# Altium PCB Rev4_FE_Test.PCBDOC (part 2 of 2)
Units mm, origin at the board's own origin, x right, y up, seen from the top; angles counter-clockwise.
Board outline 99.7 x 23.5 mm, 6 copper layers (Top Layer, Int1 (GND), Int2 (Sign), Int3 (Sign), Int4 (GND), Bottom Layer), stack 1.49 mm thick; 159 components, 78 nets, 449 pads, 301 vias.
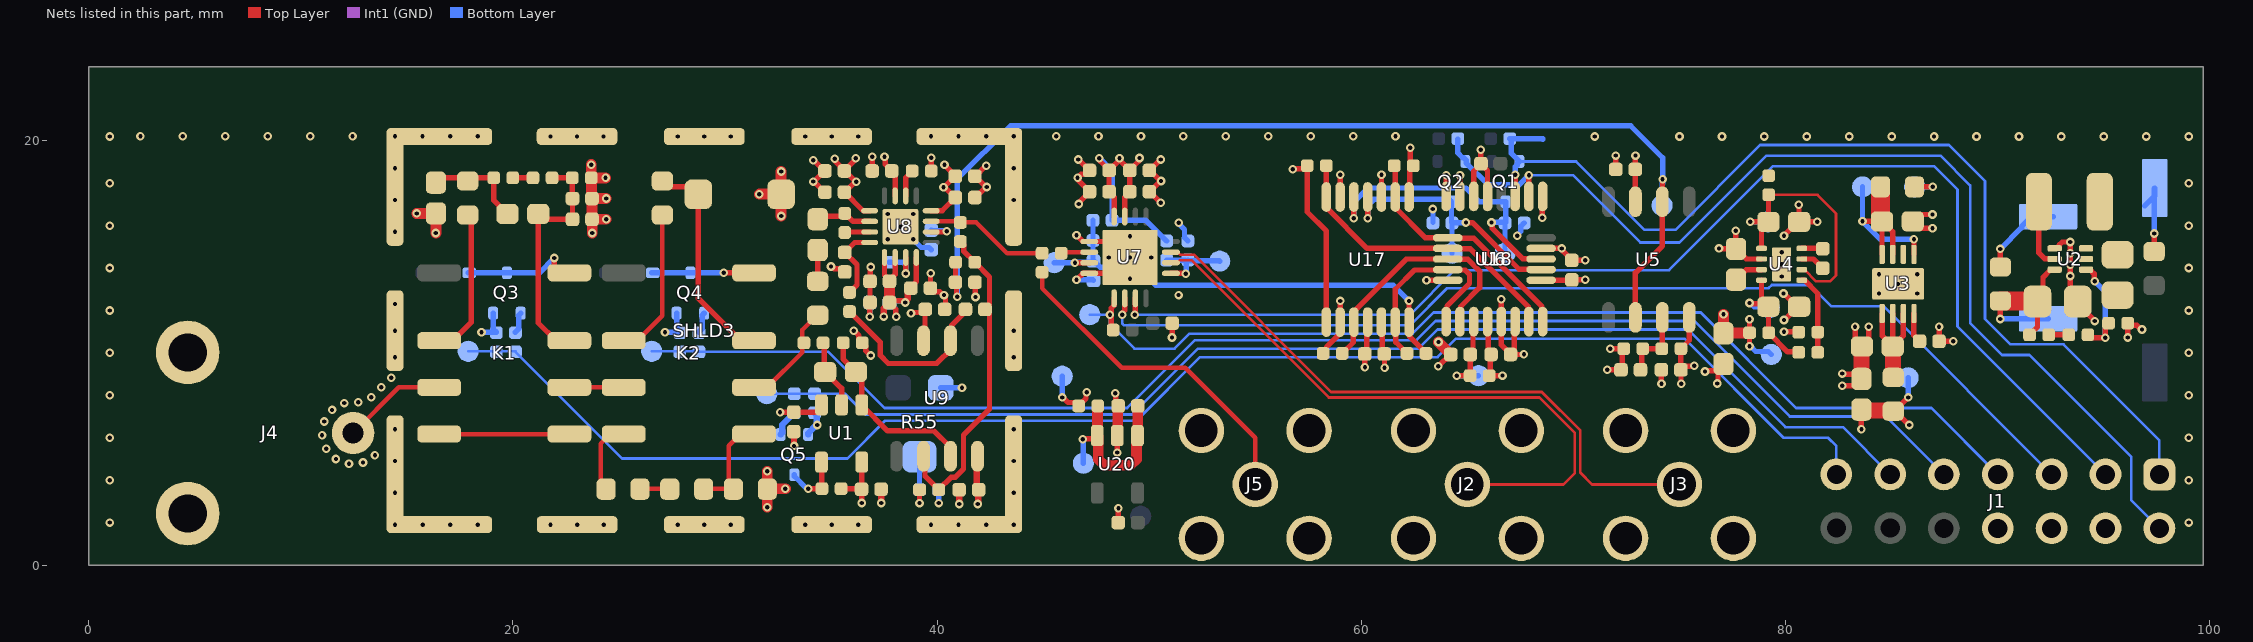
[diagram p6: the nets of this part, all layers, seen from the top]

## Via types
v1: diameter 0.406, hole 0.203, Top Layer to Bottom Layer, tented both sides, 301 vias

## Nets (pads, with @x,y where several pads share a name; then routed paths per layer and width w, separated by ;. In a path a pad name is that pad's centre, name@x,y a point inside that pad or via, vN(x,y) a via of type N, cw(c..) or ccw(c..) an arc to the next point about the centre after c; other vN are vias at no path point) (continued)
+5V: C12.1 C13.2 C15.2 C17.2 C22.2 C23.2 C24.2 C25.2 C31.2 C32.1 C33.1 C34.1 C35.2 C36.2 C107.2 C108.2 FB7.2 R1.2 R6.2 R22.2 R23.2 R51.2 R97.2 R117.1 TP10.1 TP54.1 U1.5 U5.7 U6.1 U7.3 U7.4 U8.1 U8.12 U8.15 U9.7 U17.12 U18.4 | length 48.3
  Top Layer w0.25: v1(35.175,19.154) 35.215,19.115 35.215,19.014 35.635,18.594 C32.1@35.635,18.575 C32.1@35.654,18.575 ; C34.1@35.635,17.575 36.508,16.702 36.548,16.702 36.55,16.7 U8.1@36.825,16.7 ; C34.1@35.654,17.575 36.151,18.072 v1(36.185,18.072) ; v1@36.125,18.075 36.125,18.104 C32.1@35.654,18.575 ; v1(36.175,19.175) 36.175,19.134 35.654,18.613 C32.1@35.654,18.575 ; v1(37.525,19.25) 37.555,19.22 37.555,18.899 38.025,18.429 U8.15@38.025,17.4 ; v1(38.775,11.875) 38.805,11.905 39.395,11.905 C31.2@39.431,11.941 ; U8.12@39.725,16.7 40.24,16.7 C24.2@40.865,17.325 40.846,17.325 40.403,17.768 40.342,17.768 v1(40.303,17.807) 40.329,17.807 C33.1@40.846,18.325 ; v1(40.35,18.875) 40.35,18.858 40.846,18.361 C33.1@40.846,18.325 ; v1(47.653,19.182) 47.693,19.142 47.693,19.036 48.11,18.619 C36.2@48.11,18.6 ; U7.4@48.35,16.425 48.35,17.341 48.11,17.581 C22.2@48.11,17.6 C36.2@48.11,18.6 ; U7.3@48.85,16.425 48.85,17.341 49.09,17.581 C23.2@49.09,17.6 C25.2@49.09,18.6 48.63,19.06 48.63,19.145 v1(48.6,19.175) 48.57,19.145 48.57,19.06 C36.2@48.11,18.6 ; C25.2@49.09,18.619 49.503,19.032 49.503,19.145 v1(49.542,19.185)
  Top Layer w0.254: R51.2@35.475,3.6 35.488,3.588 36.427,3.588 C17.2@36.44,3.575 ; v1(36.45,2.925) 36.445,2.93 36.445,3.57 C17.2@36.44,3.575 ; U1.5@36.45,4.85 36.445,4.845 36.445,3.58 C17.2@36.44,3.575 ; U9.7@39.365,10.575 39.431,10.641 C31.2@39.431,11.941 ; U9.7@39.415,10.575 U9.7@39.453,10.613 ; v1(45.9,7.9) 45.941,7.9 46.182,7.659 46.516,7.659 R117.1@46.675,7.5 46.675,7.512 47.021,7.858 47.021,8.121 v1(47.05,8.15) ; U17.12@60.95,11.45 60.988,11.412 60.988,10.048 C107.2@61.085,9.95 C107.2@61.091,9.944 ; v1(61.096,9.304) 61.091,9.309 61.091,9.933 C107.2@61.096,9.939 ; U18.4@65.95,11.475 65.988,11.438 65.988,10.052 C108.2@66.115,9.925 66.07,9.88 66.07,8.97 FB7.2@66.025,8.925 v1@66.649,8.925 ; U6.1@68.475,13.425 68.482,13.433 69.918,13.433 C13.2@69.925,13.44 v1@70.549,13.44 ; U5.7@72.92,17.125 72.918,17.127 72.918,18.648 C12.1@72.915,18.65 72.92,18.655 72.92,19.295 v1(72.925,19.3) ; v1(83.575,6.4) C15.2@83.575,7.325 ; R6.2@85.075,7.25 R6.2@85.125,7.25 ; v1(85.775,7.9) R6.2@85.125,7.25 ; v1(85.825,6.6) 85.175,7.25 R6.2@85.125,7.25
  Top Layer w0.75: C15.2@83.575,7.325 83.612,7.288 85.037,7.288 R6.2@85.075,7.25
  Bottom Layer w0.254: v1(45.9,7.9) TP54.1@45.9,8.9 ; v1(47.653,19.182) 48.25,18.585 R97.2@48.25,16.25 49.85,16.25 R1.2@50.825,15.275 ; R23.2@63.379,16.151 v1@63.379,16.775 ; v1(67.35,15.525) 67.35,15.566 67.516,15.732 67.516,15.966 R22.2@67.675,16.125 ; v1@85.775,7.925 TP10.1@85.775,8.825
  other v1: 66.654,8.931 70.554,13.446 63.374,16.781
+5V2: R4.2 R7.1 R8.1 TP4.1 TP13.1 | length 5.7
  Top Layer w0.254: R7.1@86.08,17.825 v1(86.93,17.825) ; R4.2@90.125,14.05 v1(90.125,14.9)
  Bottom Layer w0.254: TP13.1@86.08,17.825 v1(86.93,17.825) ; v1(90.125,14.9) 91.127,15.902 91.127,15.952 91.6,16.425 TP4.1@92.625,16.425
-5V: C14.2 C16.2 C37.2 C38.2 C39.1 C63.1 C64.1 C78.2 C124.2 R9.2 R16.1 R32.2 TP15.1 U1.3 U5.4 U8.5 U8.6 U8.8 U8.10 U9.4 | length 25.8
  Top Layer w0.127: C38.2@37.76,13.375 C38.2@37.76,13.427 ; C37.2@38.765,13.05 C37.2@38.765,13.102
  Top Layer w0.25: U8.5@37.525,14.5 37.525,13.662 37.76,13.427 38.025,13.692 U8.6@38.025,14.5 ; C39.1@37.76,12.375 37.885,12.5 37.934,12.451 38.369,12.451 38.445,12.375 v1(38.5,12.375) ; C39.1@37.854,12.263 38.054,12.063 38.054,11.721 v1(38.075,11.7) ; C37.2@38.765,13.102 39.025,13.362 U8.8@39.025,14.5 ; U8.10@39.725,15.7 40.389,15.7 v1@40.409,15.719 ; C14.2@75.07,9.195 75.07,8.555 v1(75.075,8.55) ; U5.4@75.46,11.675 75.46,10.595 R16.1@75.065,10.2 C14.2@75.065,9.2 75.235,9.37 75.67,9.37 v1(75.7,9.4) ; C16.2@77.075,10.925 C16.2@77.088,10.938 ; R9.2@78.287,10.938 R9.2@78.3,10.95 ; v1(78.3,10.32) R9.2@78.3,10.95 ; v1(78.3,11.58) R9.2@78.3,10.95
  Top Layer w0.254: v1(32.6,7.2) 32.605,7.205 33.245,7.205 C124.2@33.25,7.21 34.379,7.21 34.55,7.381 U1.3@34.55,7.55
  Top Layer w0.3: v1(37.487,11.712) 37.487,12.096 37.752,12.361 C39.1@37.752,12.367 ; v1(38.5,12.375) 38.5,12.418 38.623,12.541 38.623,12.908 C37.2@38.765,13.05 ; C64.1@41.88,3.605 U9.4@41.88,5.1 ; v1(41.925,2.875) 41.943,2.893 41.943,3.518 C64.1@41.965,3.54 ; U9.4@41.93,5.1 U9.4@41.955,5.125
  Top Layer w0.5: C39.1@37.76,12.375 C38.2@37.76,13.375 ; C16.2@77.075,10.925 v1(77.075,11.825) ; C16.2@77.088,10.938 R9.2@78.287,10.938
  Bottom Layer w0.25: v1(37.487,11.712) 37.471,11.727 37.471,12.067 37.76,12.356 C78.2@37.76,12.375 37.833,12.448 38.384,12.448 38.457,12.375 v1(38.5,12.375) ; R32.2@37.75,13.375 37.755,13.37 C78.2@37.755,12.38 ; C78.2@37.76,12.37 38.045,12.085 38.045,11.73 v1(38.075,11.7) ; C63.1@39.725,15.785 39.758,15.752 40.376,15.752 v1@40.409,15.719 ; v1(78.3,10.32) 78.342,10.32 78.594,10.069 79.181,10.069 TP15.1@79.325,9.925
  other v1: 40.455,15.73
-VBIAS: C28.1 R47.1 TP19.1 U5.2 U5.6 | length 51.2
  Top Layer w0.25: R47.1@40.875,14.275 40.87,14.27 40.87,13.33 C28.1@40.865,13.325 40.92,13.27 40.92,12.68 v1(40.95,12.65)
  Top Layer w0.254: U5.2@72.92,11.675 72.92,13.77 74.19,15.04 U5.6@74.19,17.125 74.195,17.13 74.195,18.175 v1(74.201,18.18)
  Bottom Layer w0.254: v1(40.95,12.65) 40.95,18.189 43.461,20.7 72.7,20.7 74.201,19.199 v1(74.201,18.18) ; TP19.1@74.175,16.95 74.188,16.963 74.188,17.992 v1@74.201,18.005
ATTEN_4: J1.13 R27.2 R28.2 TP25.1 | length 72.3
  Bottom Layer w0.127: TP25.1@17.9,10.075 19.225,10.075 R27.2@20.125,10.075 ; R27.2@20.125,10.05 25.15,5.025 35.775,5.025 37.55,6.8 49.4,6.8 52.4,9.8 63.6,9.8 64.472,10.672 75.228,10.672 79.9,6 82,6 82.392,5.608 J1.13@82.392,4.27
ATTEN_OUT: K2.6 R31.1 R41.2 | length 5.1
  Top Layer w0.213: K2.6@31.37,8.375 32,8.375 33.644,10.019 33.644,10.394 R41.2@33.725,10.475 33.65,10.55 33.65,11.08 34.345,11.775 R31.1@34.375,11.775
DC_CPL_4: J1.11 R3.2 R35.2 TP22.1 | length 57.8
  Bottom Layer w0.127: TP22.1@31.975,8.075 R3.2@33.275,8.075 R35.2@34.225,8.075 35.65,8.075 36.625,7.1 49.2,7.1 52.3,10.2 62.7,10.2 63.6,11.1 75.4,11.1 80,6.5 82.702,6.5 J1.11@84.932,4.27
DC_CPLn: Q5.1 R51.1 U1.4 | length 2.9
  Top Layer w0.254: v1(33.925,3.6) R51.1@34.575,3.6 34.563,3.612 34.563,4.838 U1.4@34.55,4.85
  Bottom Layer w0.254: Q5.1@33.275,4.25 33.275,4.185 33.831,3.629 33.896,3.629 v1(33.925,3.6)
GND: C1.1 C2.1 C3.1 C5.1 C6.1 C7.1 C8.1 C10.1 C11.1 C12.2 C13.1 C14.1 C15.1 C16.1 C17.1 C18.2 C20.1 C21.1 C22.1 C23.1 C24.1 C25.1 C26.1 C28.2 C29.1 C31.1 C32.2 C33.2 C34.2 C35.1 C36.1 C37.1 C38.1 C39.2 C63.2 C64.2 C78.1 C100.1 C102.2 C107.1 C108.1 C109.1 C110.1 C124.1 C125.1 C126.1 J1.4 J1.6 J1.8 J2.2 J3.2 J4.2 J5.2 Q3.3 Q4.3 Q5.3 R2.2 R13.1 R14.2 R26.1 R28.1 R35.1 R49.1 R50.1 R53.1 R54.1 R55.3 R96.1 R98.1 R105.1 SHLD3.1 U2.4 U3.6 U3.9 U4.2 U4.9 U6.4 U6.10 U7.5 U7.8 U7.17 U8.17 U17.3 U17.6 U17.11 U18.5 U18.6 U18.9 U18.13 U18.14 U18.15 U18.16 U20.2 | length 104.7
  Top Layer w0.25: v1(34.167,18.075) v1@34.197,18.075 ; v1@34.198,19.075 C32.2@34.697,18.575 ; C34.2@34.715,17.57 34.702,17.57 v1@34.197,18.075 ; C32.2@34.715,18.575 C32.2@34.697,18.575 ; v1(36.825,11.699) 36.833,11.707 36.833,12.368 C39.2@36.84,12.375 C38.1@36.84,13.375 36.858,13.393 36.858,14.033 v1(36.875,14.051) ; C35.1@36.94,18.575 36.945,18.58 36.945,19.246 v1(36.95,19.251) ; v1(39.7,13.75) 39.693,13.743 39.693,13.058 C37.1@39.685,13.05 39.858,12.877 40.131,12.877 40.283,12.725 v1(40.325,12.725) 40.325,12.683 40.396,12.612 C31.1@40.396,12.332 ; C28.2@41.785,13.325 41.8,13.31 41.8,12.65 v1(41.815,12.635) ; v1(46.575,13.45) 46.875,13.75 U7.17@48.35,13.75 ; v1(46.575,15.55) 46.875,15.25 U7.5@47.175,15.25 48.35,15.25 v1(49.1,14.5) ; v1@34.198,18.075 C32.2@34.697,18.575
  Top Layer w0.254: v1(14.45,11.05) SHLD3.1@14.45,11.075 ; C20.1@23.735,16.3 C20.1@23.743,16.292 ; v1@23.743,15.657 v1(23.75,15.65) ; v1(35,14.075) 35.041,14.075 35.154,13.962 35.485,13.962 C29.1@35.632,13.815 ; v1(36.075,11.05) 36.316,10.809 36.316,10.634 36.634,10.316 36.634,10.109 v1(36.868,9.875) ; R50.1@39.725,18.575 v1(39.725,19.205) ; C33.2@41.785,18.325 C33.2@41.803,18.325 ; C24.1@41.93,17.18 C24.1@41.785,17.325 41.803,17.325 42.299,17.821 v1@42.307,17.821 ; v1(42.325,18.825) 42.303,18.825 C33.2@41.803,18.325 ; v1(42.336,17.821) v1@42.307,17.821 ; v1(46.658,19.117) 46.666,19.117 47.182,18.6 C36.1@47.19,18.6 47.017,18.427 46.802,18.427 v1(46.625,18.25) 46.654,18.221 46.654,18.149 47.19,17.613 47.19,17.582 46.715,17.107 46.715,17.047 v1(46.686,17.018) ; v1(48.397,8.097) 48.426,8.067 48.426,7.614 C125.1@48.54,7.5 ; v1(48.5,5.3) U20.2@48.5,6.1 ; C126.1@48.54,2 48.54,2.665 v1(48.55,2.675) ; C23.1@50.01,17.6 C23.1@50.018,17.6 ; C25.1@50.01,18.6 C25.1@50.018,18.6 ; v1(50.542,19.117) 50.534,19.117 C25.1@50.018,18.6 ; v1(50.543,17.084) 50.534,17.084 C23.1@50.018,17.6 ; v1(50.561,18.104) v1@50.532,18.104 ; v1(51.075,10.724) 51.08,10.729 51.08,11.395 C26.1@51.085,11.4 ; U17.6@59,17.35 v1(59,18.4) ; v1@60.165,9.326 C107.1@60.165,9.95 60.262,10.047 60.262,11.412 U17.11@60.3,11.45 ; U17.3@60.95,17.35 v1(60.95,18.4) ; v1(63.075,13.425) U6.10@64.075,13.425 ; v1(63.625,9.375) 63.647,9.375 64.197,9.925 C110.1@64.215,9.925 ; U18.16@64,17.375 v1(64,18.375) ; U18.15@64.65,17.375 v1(64.65,18.375) ; U18.14@65.3,17.375 65.3,18.567 C109.1@65.64,18.907 ; v1(65.63,19.575) 65.635,19.57 65.635,18.93 C109.1@65.64,18.925 C109.1@65.64,18.907 ; U18.13@65.95,17.375 65.95,18.597 C109.1@65.64,18.907 ; v1(66.6,12.525) U18.5@66.6,11.475 66.6,10.378 C108.1@67.035,9.943 ; U18.6@67.25,11.475 67.25,10.947 67.2,10.897 67.2,10.108 C108.1@67.035,9.943 ; v1@67.659,9.925 C108.1@67.035,9.925 C108.1@67.035,9.943 ; U6.4@68.475,14.925 v1(69.45,14.925) 69.479,14.896 69.479,14.824 69.925,14.378 C13.1@69.925,14.36 v1@70.549,14.36 ; v1(68.525,16.375) 68.538,16.388 68.538,17.363 U18.9@68.55,17.375 ; v1(71.59,9.2) C100.1@72.24,9.2 72.303,9.263 72.303,10.137 R14.2@72.365,10.2 v1(71.735,10.2) ; C12.2@71.995,18.65 71.998,18.653 71.998,19.298 v1(72,19.3) ; C14.1@74.145,9.2 74.148,9.198 74.148,8.552 v1(74.15,8.55) ; v1(76.2,9.125) 76.229,9.154 76.754,9.154 C16.1@76.813,9.213 ; v1(76.784,8.559) 76.813,8.588 C16.1@76.813,9.213 ; v1(76.86,14.925) 76.873,14.913 77.653,14.913 C11.1@77.658,14.908 ; C16.1@77.075,9.475 C16.1@76.813,9.213 ; v1(77.65,15.756) 77.658,15.748 C11.1@77.658,14.908 ; U4.2@78.866,14.426 78.15,14.426 77.675,14.901 C11.1@77.666,14.901 C11.1@77.658,14.908 ; v1(79.9,12.8) 79.933,12.8 80.558,12.176 80.571,12.176 79.945,11.55 v1(79.925,11.55) ; v1(79.925,11) 79.937,10.988 80.603,10.988 R13.1@80.616,10.976 ; v1(79.925,15.525) 80.576,16.176 C8.1@80.641,16.176 80.633,16.183 80.633,16.973 v1(80.625,16.981) ; C8.1@80.641,16.176 v1(81.496,16.175) ; v1(82.675,8.45) 83.25,8.45 C15.1@83.575,8.775 83.354,8.996 82.704,8.996 v1(82.675,9.025) ; C7.1@83.275,10.38 v1(83.275,11.23) ; C7.1@83.925,10.38 v1(83.925,11.23) ; C6.1@86.075,15.875 v1(86.925,15.875) ; C6.1@86.075,16.525 v1(86.925,16.525) ; v1(87.235,11.225) C10.1@87.235,10.55 v1(87.91,10.55) ; U2.4@92.685,14.925 92.87,14.925 92.893,14.948 92.893,15.076 93.042,15.225 v1(93.425,15.225) v1(93.425,14.692) v1(93.425,14.158) v1(93.425,13.625) 93.425,12.775 C3.1@93.775,12.425 ; C3.1@93.875,12.325 C3.1@93.775,12.425 ; v1(94.575,11.5) 94.575,11.513 93.775,12.312 C3.1@93.775,12.425 ; v1(96.125,10.725) R105.1@96.125,11.4 96.23,11.295 96.563,11.295 96.759,11.1 v1(96.8,11.1) ; C33.2@41.803,18.325 v1@42.307,17.821 ; C25.1@50.018,18.6 50.028,18.6 50.524,18.104 v1@50.532,18.104 ; C23.1@50.018,17.6 50.028,17.6 v1@50.532,18.104
  Top Layer w0.3: v1@33.255,5.62 C124.1@33.255,6.245 ; C17.1@37.365,3.53 37.367,3.528 37.367,2.933 v1(37.375,2.925) ; C64.2@41.023,3.528 41.045,3.505 41.045,2.88 v1(41.05,2.875)
  Top Layer w0.508: v1(15.475,16.575) C1.1@16.375,16.575 v1(16.375,15.65) ; v1(23.7,18.875) R26.1@23.7,18.25 ; v1@23.743,15.657 C20.1@23.743,16.292 ; v1(24.375,18.25) R26.1@23.7,18.25 ; v1(24.4,16.3) C20.1@23.735,16.3 C21.1@23.735,17.275 ; v1(24.4,17.275) C21.1@23.735,17.275 ; v1(31.625,17.475) 31.637,17.487 32.638,17.487 C18.2@32.65,17.475 v1(32.65,16.45) ; v1(32,2.725) R53.1@32,3.575 ; v1(32,4.425) R53.1@32,3.575 ; C18.2@32.65,17.5 v1(32.65,18.55) ; v1(32.85,3.6) 32.025,3.6 R53.1@32,3.575 ; U20.2@48.5,6.1 48.52,6.12 48.52,7.48 C125.1@48.54,7.5 ; v1(63.636,10.515) 63.636,10.504 C110.1@64.215,9.925 ; R26.1@23.7,18.25 23.717,18.233 23.717,17.293 C21.1@23.735,17.275
  Top Layer w0.75: C15.1@83.575,8.775 83.587,8.787 83.587,10.288 C7.1@83.6,10.3
  Int1 (GND) w0.254: v1@46.658,19.117 v1@46.675,19.1 ; v1@50.5,17.125 50.541,17.084 v1(50.543,17.084)
  Bottom Layer w0.254: v1(18.525,10.975) 19.225,10.975 19.075,11.125 Q3.3@19.075,11.875 ; v1(27.175,10.975) 27.875,10.975 27.725,11.125 Q4.3@27.725,11.875 ; v1(36.825,11.699) 36.833,11.707 36.833,12.368 C78.1@36.84,12.375 ; v1(38.875,15.35) 39.256,14.969 39.621,14.969 C63.2@39.725,14.865 ; v1(40.075,2.92) R54.1@40.075,3.55 ; R55.3@40.175,8.35 v1(41.175,8.35) ; v1(46.575,13.45) 47.34,13.45 C102.2@47.375,13.415 ; v1(48.1,14.5) 48.129,14.529 48.129,15.179 R98.1@48.25,15.3 48.881,15.3 49.081,15.5 v1(49.1,15.5) ; v1(51.388,16.13) 51.388,16.089 51.666,15.81 51.666,15.434 R2.2@51.825,15.275
  Bottom Layer w0.3: v1(33.26,5.615) v1@33.28,5.635 ; Q5.3@33.925,6.15 33.925,6.215 34.29,6.58 34.33,6.58 v1(34.35,6.6) 34.33,6.62 34.33,7.07 R35.1@34.225,7.175
  other v1: 14.45,1.9 15.75,1.9 17.05,1.9 18.35,1.9 21.783,1.905 23.033,1.905 24.283,1.905 27.783,1.905 29.033,1.905 30.283,1.905 33.783,1.905 35.033,1.905 36.283,1.905 39.715,1.9 41.015,1.9 42.315,1.9 43.615,1.9 1,2 99,2 14.45,3.4 43.615,3.4 1,4 99,4 12.282,4.772 12.94,4.831 14.45,4.9 43.615,4.9 11.663,5 13.502,5.177 11.21,5.481 1,6 99,6 11.011,6.111 14.45,6.4 43.615,6.4 11.111,6.764 11.481,7.311 12.057,7.634 12.716,7.672 13.334,7.906 1,8 99,8 13.801,8.373 14.278,8.829 60.171,9.321 14.45,9.8 43.61,9.8 67.664,9.931 1,10 99,10 43.61,11.05 1,12 99,12 14.45,12.3 51.385,12.725 84.4,12.8 86.2,12.8 85.3,13.25 49.1,13.5 79.825,13.6 84.4,13.7 86.2,13.7 1,14 99,14 79.825,14.175 70.554,14.366 50.1,14.5 79.825,14.75 37.675,15.35 14.448,15.705 38.275,15.95 1,16 99,16 37.675,16.55 38.875,16.55 14.448,17.205 43.613,17.205 1,18 99,18 14.448,18.705 43.613,18.705 34.167,19.075 1,20.2 2.448,20.205 4.448,20.205 6.448,20.205 8.448,20.205 10.448,20.205 12.448,20.205 14.448,20.205 15.748,20.205 17.048,20.205 18.348,20.205 21.78,20.2 23.03,20.2 24.28,20.2 27.78,20.2 29.03,20.2 30.28,20.2 33.78,20.2 35.03,20.2 36.28,20.2 39.713,20.205 41.013,20.205 42.313,20.205 43.613,20.205 45.613,20.205 47.613,20.205 49.613,20.205 51.613,20.205 53.613,20.205 55.613,20.205 57.613,20.205 59.613,20.205 61.613,20.205 71,20.2 75,20.2 77,20.2 79,20.2 81,20.2 83,20.2 85,20.2 87,20.2 89,20.2 91,20.2 93,20.2 95,20.2 97,20.2 99,20.2
NetC1_2: C1.2 C19.2 R24.1 R36.2 | length 5
  Top Layer w0.254: C1.2@16.375,17.95 16.675,18.25 17.725,18.25 R36.2@17.875,18.1 ; R36.2@17.875,18.025 18.1,18.25 R24.1@19.088,18.25 ; R24.1@19.1,18.25 19.1,17.2 C19.2@19.75,16.55
NetC2_2: C2.2 L1.1 R5.1 TP3.1 U2.2 U2.3 | length 4.1
  Top Layer w0.254: R5.1@97.375,14.775 v1(97.375,15.625)
  Bottom Layer w0.254: TP3.1@96.927,16.925 TP3.1@97.375,17.373 ; v1(97.375,15.625) TP3.1@97.375,17.373 ; TP3.1@97.375,17.373 97.4,17.398 TP3.1@97.4,17.775 97.375,17.75 TP3.1@97.375,17.373
NetC3_2: C3.2 R4.1 R10.2 TP1.1 U2.6 | length 8.5
  Top Layer w0.254: v1(90.125,11.6) R4.1@90.125,12.45 ; R10.2@91.5,10.85 91.875,11.225 C3.2@91.875,12.425 ; C3.2@91.85,12.45 C3.2@91.875,12.425 ; U2.6@92.685,13.925 92.5,13.925 92.137,13.562 92.137,12.687 C3.2@91.875,12.425
  Top Layer w0.9: R4.1@90.125,12.45 C3.2@91.85,12.45
  Bottom Layer w0.254: v1(90.125,11.6) TP1.1@92.375,11.6
NetC4_1: C4.1 R41.1 U1.2 | length 3.3
  Top Layer w0.254: R41.1@34.625,10.475 34.675,10.425 34.675,9.15 35.5,8.325 U1.2@35.5,7.55
NetC4_2: C4.2 R49.2 U1.1 U9.3 | length 8.7
  Top Layer w0.25: 38.5,6.325 39.86,6.325 40.635,5.55 U9.3@40.635,5.125
  Top Layer w0.254: R49.2@35.575,10.475 35.575,9.71 36.175,9.11 C4.2@36.175,9.1 36.45,8.825 U1.1@36.45,7.55 37.675,6.325 38.5,6.325
NetC5_2: C5.2 R9.1 R11.2 TP12.1 U4.4 | length 6.2
  Top Layer w0.254: v1(78.3,12.35) 78.329,12.321 C5.2@79.045,12.321 ; U4.4@78.866,13.426 78.866,12.501 C5.2@79.045,12.321 ; R11.2@80.616,10.026 80.59,10.051 80.099,10.051 79.195,10.955 79.195,12.171 C5.2@79.045,12.321
  Bottom Layer w0.254: v1(78.3,12.35) 78.341,12.35 78.527,12.165 79.185,12.165 TP12.1@79.225,12.125
NetC6_2: C6.2 R7.2 TP9.1 U3.5 U3.7 U3.8 | length 11
  Top Layer w0.25: U3.8@84.55,14.645 C6.2@84.548,16.187 ; C6.2@84.553,16.2 85.05,15.703 U3.7@85.05,14.645 ; U3.5@86.05,14.645 v1(86.05,15.35)
  Top Layer w0.254: v1(83.625,16.2) C6.2@84.545,16.2 ; U3.8@84.55,14.645 U3.8@84.55,14.645 ; C6.2@84.548,16.187 84.548,16.197 C6.2@84.545,16.2 ; C6.2@84.553,16.2 C6.2@84.545,16.2
  Top Layer w0.9: R7.2@84.48,17.825 84.48,16.225 84.505,16.2 C6.2@84.545,16.2
  Bottom Layer w0.254: TP9.1@83.625,17.825 v1(83.625,16.2) 84.475,15.35 v1(86.05,15.35)
NetC7_2: C7.2 R6.1 U3.1 U3.2 U3.3 | length 7
  Top Layer w0.254: U3.1@84.55,11.855 84.55,10.81 C7.2@85.05,10.31 ; C7.2@84.94,10.3 C7.2@85.05,10.3 ; U3.2@85.05,11.855 C7.2@85.05,10.31 ; C7.2@85.125,10.075 85.062,10.137 85.05,10.15 C7.2@85.05,10.3 ; C7.2@85.15,10.3 C7.2@85.05,10.3 ; U3.3@85.55,11.855 85.55,10.81 C7.2@85.05,10.31 ; C7.2@85.05,10.3 C7.2@85.05,10.31
  Top Layer w0.75: C7.2@85.05,10.3 85.062,10.287 85.062,10.137 85.062,8.863 R6.1@85.075,8.85
NetC8_2: C8.2 R8.2 TP11.1 U4.1 U4.6 | length 12.8
  Top Layer w0.127: R8.2@79.2,17.45 81.5,17.45 82.375,16.575 82.375,13.65 82.1,13.375 81.441,13.375 80.891,13.926 U4.6@80.766,13.926
  Top Layer w0.254: v1(78.335,16.175) C8.2@79.191,16.176 78.866,15.851 U4.1@78.866,14.926 ; C8.2@79.191,16.176 79.195,16.18 79.195,17.445 R8.2@79.2,17.45
  Bottom Layer w0.254: v1(78.335,16.175) TP11.1@79.175,16.175
NetC9_1: C9.1 U4.7 | length 1.2
  Top Layer w0.254: U4.7@80.766,14.426 81.314,14.426 C9.1@81.75,13.99
NetC9_2: C9.2 U4.8 | length 1
  Top Layer w0.254: U4.8@80.766,14.926 80.768,14.924 81.736,14.924 C9.2@81.75,14.91
NetC10_2: C10.2 U3.4 | length 1.4
  Top Layer w0.254: U3.4@86.05,11.855 86.05,10.833 86.315,10.568 C10.2@86.315,10.55
NetC11_2: C11.2 U4.3 | length 1.4
  Top Layer w0.254: C11.2@77.666,13.451 77.675,13.451 78.15,13.926 U4.3@78.866,13.926
NetC18_1: C18.1 K2.7 R37.2 | length 10.3
  Top Layer w0.254: R37.2@27.05,17.975 27.2,17.825 28.4,17.825 C18.1@28.75,17.475 28.75,12.565 30.74,10.575 K2.7@31.37,10.575
NetC19_1: C19.1 C20.2 C21.2 K1.7 R25.2 R26.2 | length 11.6
  Top Layer w0.254: R25.2@21.85,18.25 R26.2@22.8,18.25 22.807,18.243 22.807,17.283 C21.2@22.815,17.275 C20.2@22.815,16.3 21.45,16.3 C19.1@21.2,16.55 21.2,11.415 22.04,10.575 K1.7@22.67,10.575
NetC27_1: C27.1 R34.2 U8.2 | length 2.8
  Top Layer w0.25: C27.1@34.375,16.411 C27.1@34.375,16.3 34.513,16.438 35.512,16.438 R34.2@35.65,16.575 35.664,16.575 36.039,16.2 U8.2@36.825,16.2
NetC27_2: C27.2 R31.2 | length 1.5
  Top Layer w0.25: R31.2@34.375,13.375 C27.2@34.375,14.85
NetC29_2: C29.2 R48.1 U8.4 | length 3.6
  Top Layer w0.25: R48.1@35.875,12.85 36.225,13.2 36.225,14.16 C29.2@35.65,14.735 35.656,14.735 36.121,15.2 U8.4@36.825,15.2
NetC30_1: C30.1 R48.2 U9.6 | length 8.6
  Top Layer w0.254: R48.2@35.875,11.95 37.325,10.5 37.325,9.875 37.7,9.5 39.985,9.5 40.701,10.216 40.701,11.311 C30.1@41.44,12.05
NetC30_2: C30.2 R43.1 R47.2 R52.2 U9.2 | length 15.7
  Top Layer w0.25: R43.1@41.1,15.25 41.254,15.096 41.254,14.796 R47.2@41.775,14.275 42.475,13.575 C30.2@42.475,12.265 ; C30.2@42.26,12.05 C30.2@42.475,12.265 ; 42.475,11.6 C30.2@42.475,12.265
  Top Layer w0.254: U9.2@39.365,5.125 39.431,5.059 39.431,4.194 R52.2@40.075,3.55 40.671,4.146 40.864,4.146 41.245,4.526 41.245,6.12 42.475,7.35 42.475,11.6 ; C30.2@42.459,11.951 C30.2@42.459,12.149
NetC100_2: C100.2 R14.1 R16.2 U5.3 | length 3.4
  Top Layer w0.254: C100.2@73.16,9.2 73.213,9.253 73.213,10.147 R14.1@73.265,10.2 R16.2@74.165,10.2 74.178,10.212 74.178,11.662 U5.3@74.19,11.675
NetC110_2: C110.2 FB7.1 TP17.1 U18.3 | length 4.3
  Top Layer w0.254: v1(64.5,8.925) FB7.1@65.125,8.925 65.13,8.93 65.13,9.92 C110.2@65.135,9.925 65.262,10.052 65.262,11.438 U18.3@65.3,11.475
  Bottom Layer w0.254: v1(64.5,8.925) TP17.1@65.525,8.925
NetC125_2: C125.2 R117.2 TP52.1 U20.1 U20.3 | length 9
  Top Layer w0.254: v1(46.868,5.93) 46.897,5.959 47.409,5.959 U20.3@47.55,6.1
  Top Layer w0.5: R117.2@47.575,7.5 47.563,7.488 47.563,6.113 U20.3@47.55,6.1 47.6,6.05 47.6,4.993 47.893,4.7 49.107,4.7 49.4,4.993 49.4,6.05 49.455,6.105 49.455,7.495 C125.2@49.46,7.5
  Bottom Layer w0.254: v1(46.868,5.93) 46.884,5.914 46.884,4.816 TP52.1@46.9,4.8
NetD2_2: D2.2 K1.8 Q3.1 | length 5.6
  Top Layer w0.254: v1(21.95,14.475) 21.958,14.467 21.958,14.042 22.226,13.775 K1.8@22.67,13.775
  Bottom Layer w0.254: D2.2@17.905,13.775 Q3.1@19.725,13.775 21.25,13.775 v1(21.95,14.475)
NetD3_2: D3.2 K2.8 Q4.1 | length 4.8
  Top Layer w0.254: v1(29.95,13.775) K2.8@31.37,13.775
  Bottom Layer w0.254: D3.2@26.555,13.775 Q4.1@28.375,13.775 v1(29.95,13.775)
NetJ4_1: J4.1 K1.3 | length 4.9
  Top Layer w0.213: J4.1@12.475,6.225 14.625,8.375 K1.3@16.53,8.375
NetJ5_1: J5.1 R30.2 | length 15.9
  Top Layer w0.213: R30.2@44.95,13.8 44.95,13.05 48.7,9.3 51.7,9.3 55,6 J5.1@55,3.8
NetK1_2: K1.2 R36.1 | length 6.9
  Top Layer w0.254: K1.2@16.53,10.575 17.175,10.575 18.05,11.45 18.05,16.25 R36.1@17.875,16.425
NetK1_4: K1.4 K1.5 | length 6.1
  Top Layer w0.213: K1.4@16.53,6.175 K1.5@22.67,6.175
NetK1_6: K1.6 K2.3 | length 3.2
  Top Layer w0.213: K1.6@22.67,8.375 K2.3@25.23,8.375 K2.3@25.86,8.375
NetK2_2: K2.2 R37.1 | length 6.9
  Top Layer w0.213: K2.2@25.23,10.575 25.875,10.575 27.05,11.75 R37.1@27.05,16.375
NetK2_4: K2.4 R65.1 | length 3.5
  Top Layer w0.213: R65.1@24.4,3.6 24.15,3.85 24.15,5.725 24.6,6.175 K2.4@25.23,6.175
NetK2_5: K2.5 R45.2 R53.2 | length 4.9
  Top Layer w0.213: R45.2@29,3.6 30.4,3.6 30.175,3.825 30.175,5.625 30.725,6.175 K2.5@31.37,6.175
NetL1_2: L1.2 U2.5 | length 3.3
  Top Layer w0.254: L1.2@91.94,17.125 91.94,14.71 92.219,14.431 92.679,14.431 U2.5@92.685,14.425
NetQ3_2: Q3.2 R27.1 | length 1
  Bottom Layer w0.254: R27.1@20.125,10.975 20.275,11.125 20.275,11.775 Q3.2@20.375,11.875
NetQ4_2: Q4.2 R56.1 | length 1
  Bottom Layer w0.254: R56.1@28.775,10.975 28.925,11.125 28.925,11.775 Q4.2@29.025,11.875
NetQ5_2: Q5.2 R3.1 | length 1.3
  Bottom Layer w0.3: Q5.2@32.625,6.15 32.71,6.235 32.71,6.61 R3.1@33.275,7.175
NetR10_1: R10.1 R12.2 | length 0.9
  Top Layer w0.254: R10.1@92.4,10.85 R12.2@93.35,10.85
NetR11_1: R11.1 R13.2 U4.5 | length 3.8
  Top Layer w0.254: U4.5@80.766,13.426 80.887,13.426 81.516,12.797 R13.2@81.516,10.976 R11.1@81.516,10.026
NetR12_1: R12.1 R105.2 U2.1 | length 5.3
  Top Layer w0.254: U2.1@94.165,13.925 94.35,13.925 94.546,13.729 94.546,13.404 v1(94.575,13.375) ; R12.1@94.25,10.85 94.38,10.72 v1(95.07,10.72) 95.07,11.245 R105.2@95.225,11.4
  Bottom Layer w0.254: v1(94.575,13.375) 95.07,12.88 v1(95.07,10.72)
NetR24_2: R24.2 R25.1 | length 0.9
  Top Layer w0.254: R24.2@20,18.25 R25.1@20.95,18.25
NetR30_1: R30.1 R33.1 R43.2 U8.11 | length 5.8
  Top Layer w0.213: U8.11@39.725,16.2 41.05,16.2 R43.2@41.1,16.15 41.85,16.15 43.3,14.7 R30.1@44.95,14.7
NetR32_1: R32.1 U8.7 | length 2
  Top Layer w0.127: U8.7@38.525,14.5 U8.7@38.528,14.497 ; v1@38.528,13.745 v1(38.53,13.742)
  Top Layer w0.25: v1@38.528,13.745 U8.7@38.528,14.497
  Bottom Layer w0.25: R32.1@37.75,14.275 38.384,14.275 38.53,14.129 v1(38.53,13.742)
NetR33_2: R33.2 U7.6 | length 1.3
  Top Layer w0.213: R33.2@45.85,14.7 45.898,14.748 47.173,14.748 U7.6@47.175,14.75
NetR34_1: R34.1 U8.3 | length 1.2
  Top Layer w0.25: R34.1@35.65,15.675 35.675,15.7 U8.3@36.825,15.7
NetR45_1: R45.1 R65.2 | length 1.4
  Top Layer w0.213: R65.2@26,3.6 R45.1@27.4,3.6
NetR50_2: R50.2 U8.14 | length 1.3
  Top Layer w0.254: U8.14@38.525,17.4 38.525,18.263 38.825,18.563 R50.2@38.825,18.575
NetR52_1: R52.1 R54.2 R55.2 | length 2.8
  Top Layer w0.254: v1(39.175,2.92) R52.1@39.175,3.55
  Bottom Layer w0.254: v1(39.175,2.92) R54.2@39.175,3.55 R55.2@39.175,5.1
OUT_R_N: J2.1 U7.14 | length 29.6
  Top Layer w0.127: U7.14@51.025,14.25 51.34,14.25 51.461,14.371 51.998,14.371 58.47,7.9 68.4,7.9 70.068,6.232 70.068,4.343 69.525,3.8 J2.1@65,3.8
OUT_R_P: J3.1 U7.15 | length 29.7
  Top Layer w0.127: U7.15@51.025,14.75 51.34,14.75 51.461,14.629 52.105,14.629 58.576,8.157 68.507,8.157 70.325,6.339 70.325,4.35 70.875,3.8 J3.1@75,3.8
PGA_CSn_4: J1.7 R29.1 TP26.1 U7.9 | length 49.2
  Top Layer w0.25: v1(48.15,11.8) 48.213,11.737 48.213,11.187 R29.1@48.325,11.075 ; v1@48.167,11.8 48.213,11.846 48.213,12.105 48.35,12.242 U7.9@48.35,12.575
  Bottom Layer w0.127: TP26.1@47.2,11.8 v1@48.147,11.8 ; v1(48.15,11.8) v1@48.147,11.8 ; J1.7@90,4.27 86.87,7.4 80.5,7.4 76,11.9 63.4,11.9 62.409,10.909 51.909,10.909 51.2,10.2 49.3,10.2 48.147,11.353 v1@48.147,11.8
PGA_SCLK: J1.3 U7.11 | length 59.3
  Top Layer w0.25: v1(49.318,11.795) 49.35,11.827 U7.11@49.35,12.575
  Bottom Layer w0.127: v1(49.318,11.795) 62.295,11.795 64.4,13.9 74.5,13.9 79.4,18.8 87,18.8 88.1,17.7 88.1,11.25 J1.3@95.08,4.27
PGA_SDIO: J1.5 U7.10 | length 49.6
  Top Layer w0.25: v1(48.734,11.8) 48.734,11.889 48.85,12.005 U7.10@48.85,12.575
  Bottom Layer w0.127: v1(48.734,11.8) 48.734,11.374 48.809,11.3 62.3,11.3 64.052,13.052 79.202,13.052 79.35,13.2 79.979,13.2 ; 80,13.2 81.15,13.2 82.15,12.2 84.61,12.2 J1.5@92.54,4.27
SCL: J1.2 Q2.3 R21.1 U18.10 | length 50.9
  Top Layer w0.254: U18.10@67.9,17.375 v1(67.9,18.375)
  Bottom Layer w0.127: v1(67.9,18.375) 69.975,18.375 73.15,15.2 75,15.2 79.1,19.3 87.3,19.3 88.7,17.9 88.7,11.4 90.2,9.9 91.5,9.9 96.3,5.1 96.3,3.05 J1.2@97.62,1.73
  Bottom Layer w0.254: R21.1@64.55,20.075 64.55,19.42 64.772,19.198 64.837,19.198 64.945,19.09 64.945,18.96 65.987,17.918 67.443,17.918 v1(67.9,18.375)
SCL_5V: Q2.1 R23.1 TP20.1 U6.2 U17.4 | length 13.2
  Top Layer w0.254: v1(60.3,16.35) U17.4@60.3,17.35 ; v1(64.931,16.146) 64.941,16.136 65.239,16.136 67.432,13.943 68.457,13.943 U6.2@68.475,13.925
  Bottom Layer w0.254: v1(60.3,16.35) 60.3,16.95 60.588,17.238 64.142,17.238 64.25,17.13 64.25,16.15 R23.1@64.275,16.125 TP20.1@64.275,14.7 ; R23.1@64.302,16.14 v1@64.925,16.14
SDA: J1.1 Q1.3 R20.1 U18.11 | length 48.9
  Top Layer w0.254: U18.11@67.25,17.375 v1(67.25,18.4)
  Bottom Layer w0.127: Q1.3@67.46,19.025 70.125,19.025 73.35,15.8 74.8,15.8 78.8,19.8 87.7,19.8 89.4,18.1 89.4,11.6 90.6,10.4 93.1,10.4 97.62,5.88 J1.1@97.62,4.27
  Bottom Layer w0.254: R20.1@67,20.1 R20.1@67.01,20.09 ; v1(67.25,18.4) 67.265,18.415 67.265,18.775 67.342,18.852 67.342,18.917 Q1.3@67.395,18.97 ; Q1.3@67.45,19.025 Q1.3@67.395,18.97 ; 68.56,20.08 68.549,20.09 R20.1@67.01,20.09 ; R20.1@67.01,20.09 67.066,20.034 67.066,19.419 67.395,19.09 Q1.3@67.395,18.97
SDA_5V: Q1.1 R22.1 TP21.1 U6.3 U17.5 | length 15.7
  Top Layer w0.254: v1(59.65,16.35) U17.5@59.65,17.35 ; v1(66.139,16.148) 66.168,16.119 66.168,15.882 67.607,14.443 68.457,14.443 U6.3@68.475,14.425
  Bottom Layer w0.254: v1(59.65,16.35) 59.65,17.1 60.325,17.775 64.925,17.775 65.575,17.125 Q1.1@66.8,17.125 66.8,16.15 R22.1@66.775,16.125 TP21.1@66.775,14.7 ; v1@66.144,16.154 R22.1@66.768,16.154
TERM_4: J1.9 R56.2 R96.2 TP24.1 | length 66.7
  Bottom Layer w0.127: TP24.1@26.55,10.075 27.875,10.075 R56.2@28.775,10.075 ; R56.2@28.775,10.05 34.875,10.05 37.525,7.4 48.959,7.4 52.159,10.6 62.6,10.6 63.5,11.5 75.7,11.5 80.2,7 84.73,7 J1.9@87.46,4.27
TRIM1: R15.1 U17.1 | length 2.4
  Top Layer w0.25: U17.1@62.25,17.35 62.288,17.388 62.288,18.738 62.375,18.825 62.3,18.9 v1(62.3,19.675)
TRIM2: R17.1 U17.8 | length 8.5
  Top Layer w0.25: v1(56.775,18.65) 56.817,18.65 56.849,18.682 57.307,18.682 R17.1@57.45,18.825 57.45,16.65 58.35,15.75 U17.8@58.35,11.45
TRIM3: R18.1 U17.9 | length 2.8
  Top Layer w0.25: R18.1@58.188,9.988 R18.1@58.2,9.975 58.36,10.135 58.36,10.28 59,10.921 U17.9@59,11.45 v1(59,12.45)
TRIM4: C102.1 R19.1 R97.1 R98.2 TP23.1 U7.7 U17.14 | length 23
  Top Layer w0.25: v1@46.486,14.25 v1(46.5,14.25) U7.7@47.175,14.25 ; v1(62.25,12.45) U17.14@62.25,11.45 62.288,11.412 62.288,10.75 63.05,9.989 R19.1@63.05,9.975 R19.1@63.075,9.95
  Bottom Layer w0.25: TP23.1@45.525,14.25 v1(46.5,14.25) 46.53,14.28 47.32,14.28 C102.1@47.375,14.335 47.35,14.36 R98.2@47.35,15.3 R97.1@47.35,16.25
  Bottom Layer w0.254: C102.1@47.375,14.335 47.393,14.335 47.685,14.043 49.457,14.043 50.318,13.182 61.518,13.182 v1(62.25,12.45)
VCM: R1.1 R2.1 TP16.1 U7.13 | length 3.9
  Top Layer w0.254: U7.13@51.025,13.75 U7.13@51.025,13.75 51.702,13.748 v1(51.725,13.725)
  Bottom Layer w0.254: R1.1@50.825,14.375 51.683,14.375 R2.1@51.754,14.304 ; v1(51.725,13.725) 51.754,13.754 R2.1@51.754,14.304 ; TP16.1@53.325,14.325 53.3,14.35 51.85,14.35 R2.1@51.825,14.375 R2.1@51.754,14.304
VOUT1: R15.2 U6.6 U17.2 U18.8 | length 11.6
  Top Layer w0.254: R15.2@61.475,18.825 61.6,18.7 61.6,16.848 63.023,15.425 U6.6@64.075,15.425 64.093,15.407 65.293,15.407 68.512,12.188 68.512,11.513 U18.8@68.55,11.475
VOUT2: R17.2 U6.7 U17.7 U18.7 | length 14.1
  Top Layer w0.254: R17.2@58.35,18.825 U17.7@58.35,17.35 58.35,16.848 60.273,14.925 U6.7@64.075,14.925 64.093,14.907 65.143,14.907 67.862,12.188 67.862,11.513 U18.7@67.9,11.475
VOUT3: R18.2 U6.8 U17.10 U18.2 | length 12.2
  Top Layer w0.254: R18.2@59.1,9.975 59.625,10.5 59.625,11.425 U17.10@59.65,11.45 59.65,11.952 62.123,14.425 U6.8@64.075,14.425 64.093,14.407 65.018,14.407 65.575,13.85 65.575,13.075 64.688,12.188 64.688,11.513 U18.2@64.65,11.475
VOUT4: R19.2 U6.9 U17.13 U18.1 | length 9.9
  Top Layer w0.254: R19.2@62.15,9.975 61.625,10.5 61.625,11.425 U17.13@61.6,11.45 61.6,13 62.507,13.907 64.057,13.907 U6.9@64.075,13.925 64.093,13.907 64.893,13.907 65.1,13.7 65.1,13.275 64.038,12.213 64.038,11.513 U18.1@64,11.475
pads on no net: R55.1 U5.1 U5.5 U5.8 U6.5 U7.1 U7.2 U7.16 U8.9 U8.13 U8.16 U9.1 U9.5 U9.8 U20.4

## Polygon pours and split planes (outlines as drawn)
GND on Top Layer "GND_L05_P-001" (solid, remove dead copper, pour order 80): 0,0 0,23.5 99.7,23.5 99.7,0
+5V2 on Top Layer "+5V2_L01_P-001" (solid, pour order 79): 91,13.5 91,19.85 78.8,19.85 78.8,17 89.25,17 89.25,13.5
NetC2_2 on Top Layer "NetC2_2_IN_L01_P-001" (solid, pour order 78): 93.825,18.485 98.2,18.485 98.2,14 98,14 93.825,14
+3V3 on Top Layer "+3V3_L01_P-001" (solid, pour order 55): 96.7,13.6 98.2,13.6 98.2,11.65 96.7,11.65
GND on Int2 (Sign) "GND_L05_P-001" (solid, remove dead copper, pour order 85): 0,0 0,23.5 99.7,23.5 99.7,0
-5V on Int2 (Sign) "-4V8_L03_P-001" (solid, remove dead copper, pour order 60): 74.201,18.175 74.201,7.675 79.475,7.675 79.475,24 0,24 0,-76 41,-76 41,-65.9 43.125,-65.9 43.125,18.175
+3V3 on Int3 (Sign) "+3V3_L04_P-001" (solid, remove dead copper, pour order 86): 0,-76 0,23.5 99.7,23.5 99.7,-76
+5V on Int3 (Sign) "+4V8_L04_P-001" (solid, remove dead copper, pour order 72): 48.025,11.35 55.025,11.35 55.025,5.575 86.475,5.575 86.475,19.6 34.15,19.6 34.15,-59.075 48.025,-59.075
+3V3_PGA on Int3 (Sign) "+3V3_PGA_L04_P-001" (solid, pour order 66): 48.1,11.2 50.5,11.2 50.5,-59.1 48.1,-59.1
GND on Int4 (GND) "GND_L05_P-001" (solid, remove dead copper, pour order 51): 0,0 0,23.5 99.7,23.5 99.7,0
GND on Int1 (GND) "GND_L05_P-001" (solid, remove dead copper, pour order 52): 0,0 0,23.5 99.7,23.5 99.7,0
GND on Bottom Layer "GND_L05_P-001" (solid, remove dead copper, pour order 69): 0,0 0,23.5 99.7,23.5 99.7,0

## Keep-outs
Top Layer:
  rectangle: 0,21 99.7,23.5
Bottom Layer:
  rectangle: 0,21 99.7,23.5

## Other copper
Top Layer:
  pour cut-out: 14.85,19.8 43.225,19.8 43.225,2.3 14.85,2.3
  pour cut-out: 46.85,12.25 51.35,12.25 51.35,16.75 46.85,16.75

## Silkscreen, mask and mechanical layers (free items; w line width, h text height)
Top Overlay:
  text "Via shield inputs + via stitch GNDs" at 140.4,-2.65 h4
Bottom Overlay:
  text "LDO" at 84.375,18.698 h1.2
  text "+5V2" at 87.426,18.698 h1.2
  text "+5V2" at 93.576,17.373 h1.2
  text "CP_IN" at 80.53,17.246 h1.2
  text "-" at 80.175,16.447 h1.2 r180
  text "+" at 85.808,16.436 h1.2 r270
  text "-" at 83.777,16.403 h1.2
  text "BST IN" at 98.473,16.08 h1.2 r270
  text "-" at 92.225,15.472 h1.2 r180
  text "-VBIAS" at 75.766,15.423 h1.2
  text "TRIM4" at 44.821,15.075 h1.2 r270
  text "SDA_5V" at 70.97,14.475 h1.2
  text "SCL_5V" at 63.411,14.321 h1.2
  text "VCM" at 55.815,13.7 h1.2
  text "BST OUT" at 94.26,12.573 h1.2
  text "+" at 77.828,11.885 h1.2 r270
  text "CP_OUT" at 83.365,11.871 h1.2
  text "PGA_CS4" at 46.325,10.971 h1.2
  text "+" at 92.647,10.615 h1.2 r90
  text "VREF" at 66.63,9.773 h1.2
  text "-" at 78.3,9.628 h1.2
  text "-5V" at 81.68,9.603 h1.2
  text "ATTEN4" at 17,9.346 h1.2
  text "TERM4" at 25.773,9.346 h1.2
  text "+5V" at 45.05,8.578 h1.2
  text "+5V" at 88.295,8.503 h1.2
  text "+3V3" at 98.473,7.955 h1.2 r270
  text "CPL4" at 31.191,7.346 h1.2
  text "LDO" at 46.054,4.316 h1.2
  text "+3V3_PGA" at 48.754,1.816 h1.2
PCI-SIG Outline:
  the board outline again, w0.1
DrillDrawing:
  text "Drilling Details." at 225.001,62.483 h1
  text ".LEGEND" at 225.25,-14.648 h1

## Dimensions
0,-74 to 6,26 on PCI-SIG Dimensions
0,-69.5 to 6,26 on PCI-SIG Dimensions
0,37.15 to 99.7,0 on PCI-SIG Dimensions